# Altium PCB RAK4200.PcbDoc
Units mm, origin at the board's own origin, x right, y up, seen from the top; angles counter-clockwise.
Board outline 25.25 x 34.27 mm, 2 copper layers (Top Layer, Bottom Layer); 12 components, 17 nets, 52 pads, 21 vias.
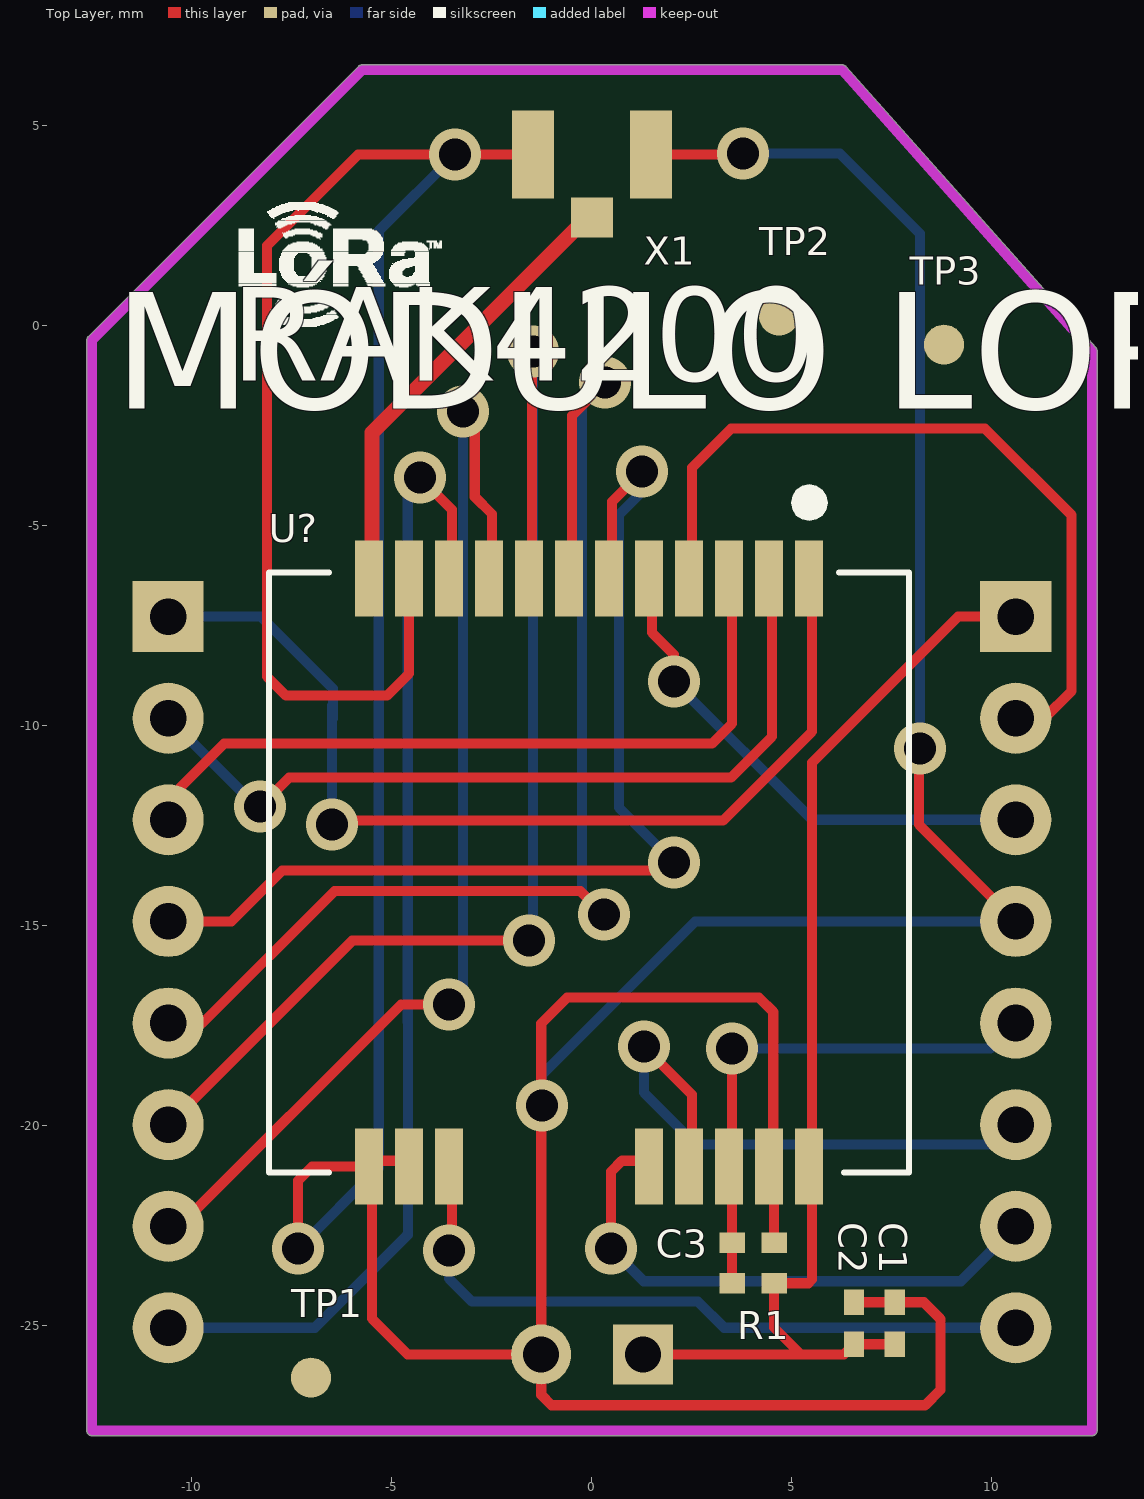
[diagram p0: Top Layer view]
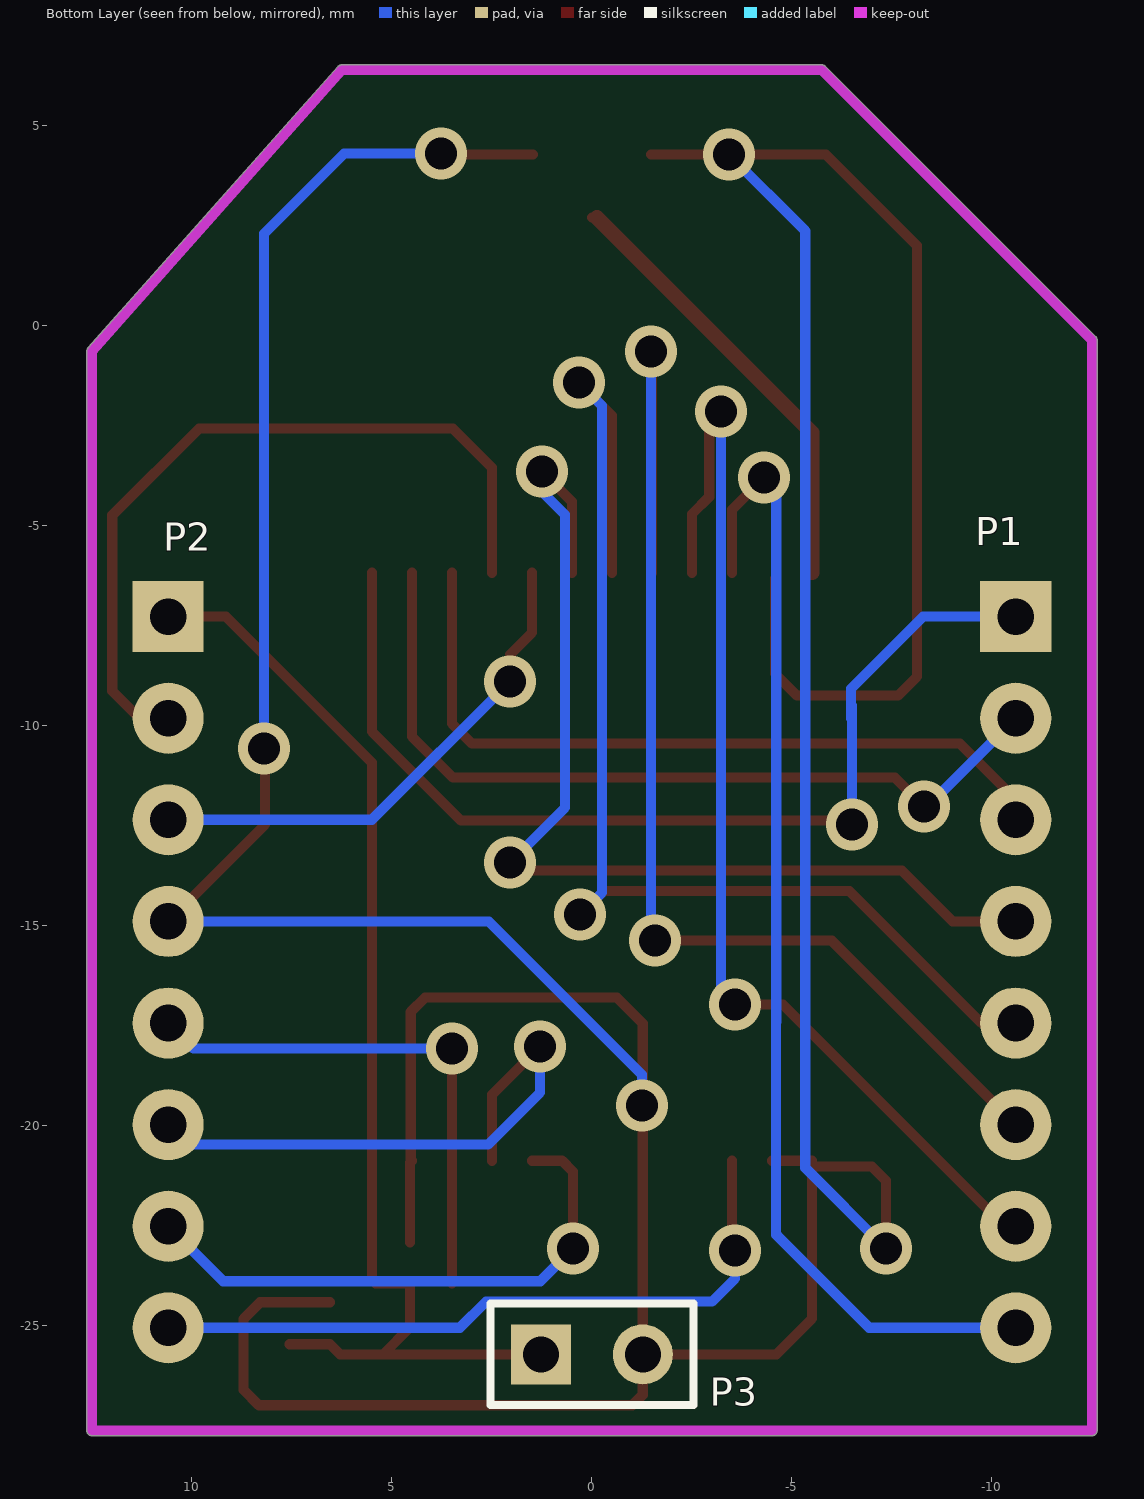
[diagram p1: Bottom Layer view, seen from below]

## Layer stack, top to bottom
Top Solder: solder mask 0.0102, Solder Resist, Dk 3.5
Top Layer: signal copper 0.0356
Dielectric 1: dielectric 0.32, FR-4, Dk 4.8
Bottom Layer: signal copper 0.0356
Bottom Solder: solder mask 0.0102, Solder Resist, Dk 3.5

## Board outline
-12.627,-27.625 -12.627,-0.363 cw(c-12.5,-0.363) -12.59,-0.272 -12.59,-0.273 -5.836,6.481 -5.837,6.481 cw(c-5.746,6.391) -5.746,6.518 6.254,6.518 cw(c6.254,6.391) 6.349,6.475 12.595,-0.551 cw(c12.5,-0.636) 12.627,-0.636 12.627,-27.625 cw(c12.5,-27.625) 12.5,-27.752 -12.5,-27.752 cw(c-12.5,-27.625)

## Design rules (kind name [scope] priority, off if disabled: settings)
Clearance [All] p1: gap=0.254
PolygonConnect [All] p1: connectstyle=Relief reliefconductorwidth=0.254 reliefentries=4 polygonreliefangle="90 Angle" airgapwidth=0.254
RoutingVias [All] p1: holewidth=0.711 width=1.27 viastyle="Through Hole" minholewidth=0.711 minwidth=1.27 maxholewidth=0.711 maxwidth=1.27
SolderMaskExpansion [All] p1: expansion=0.102
Width [All] p1: maxlimit=0.254 minlimit=0.254 preferedwidth=0.254
30 further rules are at their usual default settings.

## Components (designator, comment, footprint, x,y, rotation, side; value= is the part's Value field where it differs from the comment)
C1 "ZRB15XR61A106ME01D" C0402 7.566,-25.466 r90 top
C2 "100nF, 10 V" C0402 6.55,-25.466 r90 top
C3 "100nF, 10 V" C0402 3.502,-22.926 r0 top
P1 "68000-236HLF" HEADER1X8 -10.595,-7.275 r270 bottom
P2 "68000-236HLF" HEADER1X8 10.595,-7.275 r270 bottom
P3 "452-00009" HDR1X2 1.27,-25.72 r180 bottom
R1 "CRCW040210K0FKTD" 0402_RES 3.502,-23.942 r0 top
TP1 "TestPoint-SMD-1MM" "TestPoint - SMD_1mm" -7.025,-26.3 r90 top
TP2 "TestPoint-SMD-1MM" "TestPoint - SMD_1mm" 4.675,0.25 r90 top
TP3 "TestPoint-SMD-1MM" "TestPoint - SMD_1mm" 8.8,-0.475 r90 top
U? "RAK4200" RAK4200 -0.075,-13.675 r0 top
X1 "RECE.20279.001E.01" U.FL 0,4.275 r180 top

## Footprints (in the part's own frame and the unit in brackets; to place one, negate y for a bottom-side part, rotate by r counter-clockwise, add the part's x,y. Pads: shape width x height; smd on the part's side, far side on the other; paste and mask are expansions set on the pad)
0402_RES [mil]
  rect 25x20 smd: 1(0,0) 2(41.34,0)
  body extent 0,-10 40,14, height 8
C0402 [mil]
  rect 25x20 smd: 1(0,0) 2(41.34,0)
  body extent 0,-12 40,12, height 8
HDR1X2 [mm]
  rect 1.5x1.5 hole 0.9: 1(0,0)
  round 1.5 hole 0.9: 2(2.54,0)
  silkscreen extent -1.27,-1.27 3.81,1.27, body extent -1.22,-1.28 3.86,1.26, height 1.89
HEADER1X8 [mil] "HEAD15-NOSS"
  rect 70x70 hole 36: 1(0,0)
  round 70 hole 36: 2(100,0) 3(200,0) 4(300,0) 5(400,0) 6(500,0) 7(600,0) 8(700,0)
  body extent -48,-50 752,50, height 75
RAK4200 [mm]
  rect 0.7x1.9 smd: 1(5.5,7.35) 2(4.5,7.35) 3(3.5,7.35) 4(2.5,7.35) 5(1.5,7.35) 6(0.5,7.35) 7(-0.5,7.35) 8(-1.5,7.35) 9(-2.5,7.35) 10(-3.5,7.35) 11(-4.5,7.35) 12(-5.5,7.35) 13(-5.5,-7.35) 14(-4.5,-7.35) 15(-3.5,-7.35) 16(1.5,-7.35) 17(2.5,-7.35) 18(3.5,-7.35) 19(4.5,-7.35) 20(5.5,-7.35)
  silkscreen extent -8,-7.5 8,9.71, body extent -7.96,-7.51 8.03,7.55, height 2.5
"TestPoint - SMD_1mm" [mm]
  round 1 smd mask+0.254: 1(0,0)
U.FL [mm]
  rect 1.05x1 smd: 1(0,1.575)
  rect 1.05x2.2 smd: 2(-1.475,0) 3(1.475,0)
  body extent -1.67,-1.55 1.73,1.55, height 1.25

## Part data
C1: library part "10uF, 10V", "Cap_Cer"
C2 C3: "Cap_Cer"
P1 P2: library part "HEADER 1X8", "HEADER 1X8"
P3: library part HEADER1X2, "HEADER1X2"
R1: library part "10K0, 63 mW", "Resistor"
TP1 TP2 TP3: "TestPoint-SMD"
U?: "MODULO LORA"
X1: library part SMACONNECTOR_UFL, "Connector UFL"

## Via types
v1: diameter 1.3, hole 0.8, Top Layer to Bottom Layer, 21 vias

## Nets (pads, with @x,y where several pads share a name; then routed paths per layer and width w, separated by ;. In a path a pad name is that pad's centre, name@x,y a point inside that pad or via, vN(x,y) a via of type N, cw(c..) or ccw(c..) an arc to the next point about the centre after c; other vN are vias at no path point)
3V3: C1.1 C2.1 P2.1 P3.1 R1.2 U?.20 | length 29
  Top Layer w0.254: P3.1 5.225,-25.72 ; C1.1 C2.1 6.296,-25.72 5.225,-25.72 ; P2.1 9.15,-7.275 5.5,-10.925 5.5,-23.849 5.407,-23.942 R1.2 4.552,-25.047 5.225,-25.72
GND: C1.2 C2.2 C3.2 P2.4 P3.2 U?.11 U?.13 U?.14 U?.19 X1.2 X1.3 | length 142.4
  Top Layer w0.254: v1(-7.35,-23.075) -7.35,-21.375 -7,-21.025 U?.13 ; U?.11 -4.575,-8.7 -5.125,-9.25 -7.65,-9.25 -8.125,-8.775 -8.125,2 -5.85,4.275 v1(-3.425,4.275) X1.3 ; U?.14@-4.5,-20.878 -5.5,-20.878 -5.5,-24.825 -4.605,-25.72 P3.2 ; X1.2 3.75,4.275 v1(3.775,4.3) ; U?.19@4.5,-20.878 4.531,-20.847 4.531,-17.156 4.175,-16.8 -0.625,-16.8 -1.27,-17.445 P3.2 ; C3.2 U?.19@4.552,-20.93 ; C2.2 C1.2 8.294,-24.416 8.709,-24.831 8.709,-26.609 8.328,-26.99 -1.01,-26.99 -1.27,-26.73 P3.2 ; v1@8.175,-10.575 8.175,-12.475 P2.4
  Bottom Layer w0.254: v1(-7.35,-23.075) -5.331,-21.056 -5.331,2.369 v1(-3.425,4.275) ; v1(-1.25,-19.5) -1.25,-18.725 2.58,-14.895 P2.4 ; v1(3.775,4.3) 6.2,4.3 8.2,2.3 v1(8.2,-10.575)
I2C_SDA/PB6: P1.7 U?.9 | length 28.6
  Top Layer w0.254: P1.7 -10.315,-22.515 -4.775,-16.975 v1(-3.575,-16.975) ; v1(-3.225,-2.15) -2.931,-2.444 -2.931,-4.277 -2.5,-4.708 U?.9@-2.5,-6.178
  Bottom Layer w0.254: v1@-3.525,-17 -3.225,-16.7 v1(-3.225,-2.15)
I2C_SDA/PB7: P1.8 U?.10 | length 28.7
  Top Layer w0.254: v1(-4.3,-3.8) -3.5,-4.6 U?.10@-3.5,-6.178
  Bottom Layer w0.254: P1.8 -6.93,-25.055 -4.606,-22.731 -4.606,-22.698 -4.6,-22.692 -4.6,-17.408 -4.606,-17.402 -4.606,-4.106 v1(-4.3,-3.8)
MCU_NRST: C3.1 P2.5 R1.1 U?.18 | length 13.2
  Top Layer w0.254: v1(3.5,-18.075) 3.5,-20.878 3.5,-22.924 C3.1 R1.1
  Bottom Layer w0.254: v1(3.5,-18.075) 9.955,-18.075 P2.5
NetU?_12: U?.12 X1.1 | length 11.2
  Top Layer w0.254: X1.1@-0.125,2.7 X1.1
  Top Layer w0.373: U?.12@-5.5,-6.178 -5.5,-2.675 X1.1@-0.125,2.7
SPI_CLK_1: P2.8 U?.15 | length 17.7
  Top Layer w0.254: v1(-3.575,-23.125) -3.5,-23.05 U?.15@-3.5,-20.878
  Bottom Layer w0.254: v1(-3.575,-23.125) -3.575,-23.825 -3,-24.4 2.65,-24.4 3.305,-25.055 P2.8
SPI_MISO_1: P2.7 U?.16 | length 14.1
  Top Layer w0.254: v1(0.475,-23.075) 0.475,-21.15 0.747,-20.878 U?.16@1.5,-20.878
  Bottom Layer w0.254: v1(0.475,-23.075) 1.292,-23.892 9.218,-23.892 P2.7
SPI_MOSI_1: P2.6 U?.17 | length 14.5
  Top Layer w0.254: v1(1.3,-18.025) 2.5,-19.225 U?.17@2.5,-20.878
  Bottom Layer w0.254: v1(1.3,-18.025) 1.3,-19.175 2.6,-20.475 10.095,-20.475 P2.6
SWCLK/PA14: P1.6 U?.8 | length 31.2
  Top Layer w0.254: P1.6 -5.995,-15.375 v1(-1.575,-15.375) ; U?.8@-1.5,-6.178 -1.5,-0.675 v1(-1.475,-0.65)
  Bottom Layer w0.254: v1(-1.575,-15.375) -1.475,-15.275 v1(-1.475,-0.65)
SWDIO/PA13: P1.5 U?.7 | length 31.4
  Top Layer w0.254: P1.5 -9.735,-17.435 -6.433,-14.133 -0.292,-14.133 v1(0.3,-14.725) ; U?.7@-0.5,-6.178 -0.5,-2.25 v1(0.325,-1.425)
  Bottom Layer w0.254: v1(0.3,-14.725) -0.25,-14.175 -0.25,-2 v1(0.325,-1.425)
UART0_DE/PA12: P1.4 U?.6 | length 26.7
  Top Layer w0.254: P1.4 -9.02,-14.895 -7.75,-13.625 1.85,-13.625 v1(2.05,-13.425) ; U?.6@0.5,-6.178 0.5,-4.4 v1(1.25,-3.65)
  Bottom Layer w0.254: v1(1.25,-3.65) 1.25,-4.15 0.675,-4.725 0.675,-12.05 v1(2.05,-13.425)
UART0_RX/PA10: P2.3 U?.5 | length 12.9
  Top Layer w0.254: U?.5@1.5,-6.178 1.5,-7.675 2.05,-8.225 v1(2.05,-8.9)
  Bottom Layer w0.254: v1(2.05,-8.9) 5.505,-12.355 P2.3
UART0_TX/PA9: P2.2 U?.4 | length 19.5
  Top Layer w0.254: U?.4@2.5,-6.178 2.5,-3.55 3.475,-2.575 9.825,-2.575 11.992,-4.742 11.992,-9.133 11.31,-9.815 P2.2
UART1_DE/PA1: P1.3 U?.3 | length 19.2
  Top Layer w0.254: P1.3 -10.595,-11.845 -9.2,-10.45 3,-10.45 3.5,-9.95 U?.3@3.5,-6.178
UART1_RXPA3: P1.1 U?.1 | length 26
  Top Layer w0.254: P1.1 P1.1@-10.07,-7.8 ; v1@-6.275,-12.375 3.275,-12.375 5.5,-10.15 U?.1@5.5,-6.178
  Bottom Layer w0.254: P1.1 -8.275,-7.275 -6.475,-9.075 -6.475,-9.825 ; v1(-6.5,-12.475) -6.5,-9.5
UART1_TXPA2: P1.2 U?.2 | length 20.4
  Top Layer w0.254: v1(-8.3,-12.025) -7.575,-11.3 3.475,-11.3 4.5,-10.275 U?.2@4.5,-6.178
  Bottom Layer w0.254: P1.2 v1@-8.63,-11.78
pads on no net: TP1.1 TP2.1 TP3.1

## Keep-outs
Keep-Out Layer:
  lines w0.254: -12.5,-27.625 -12.5,-0.363 -5.746,6.391 6.254,6.391 12.5,-0.636 12.5,-27.625 -12.5,-27.625

## Silkscreen, mask and mechanical layers (free items; w line width, h text height)
Top Overlay:
  drawing of 432 lines, arcs and shapes, not listed
  text "RAK4200" at -9.033,-2.147 h4
  text "MÓDULO LORA" at -11.954,-3.036 h5